# Altium PCB TablePCB2.PcbDoc
Units mm, origin at the board's own origin, x right, y up, seen from the top; angles counter-clockwise.
Board outline 145 x 85.7 mm, 2 copper layers (Top Layer, Bottom Layer); 21 components, 30 nets, 150 pads, 20 vias.
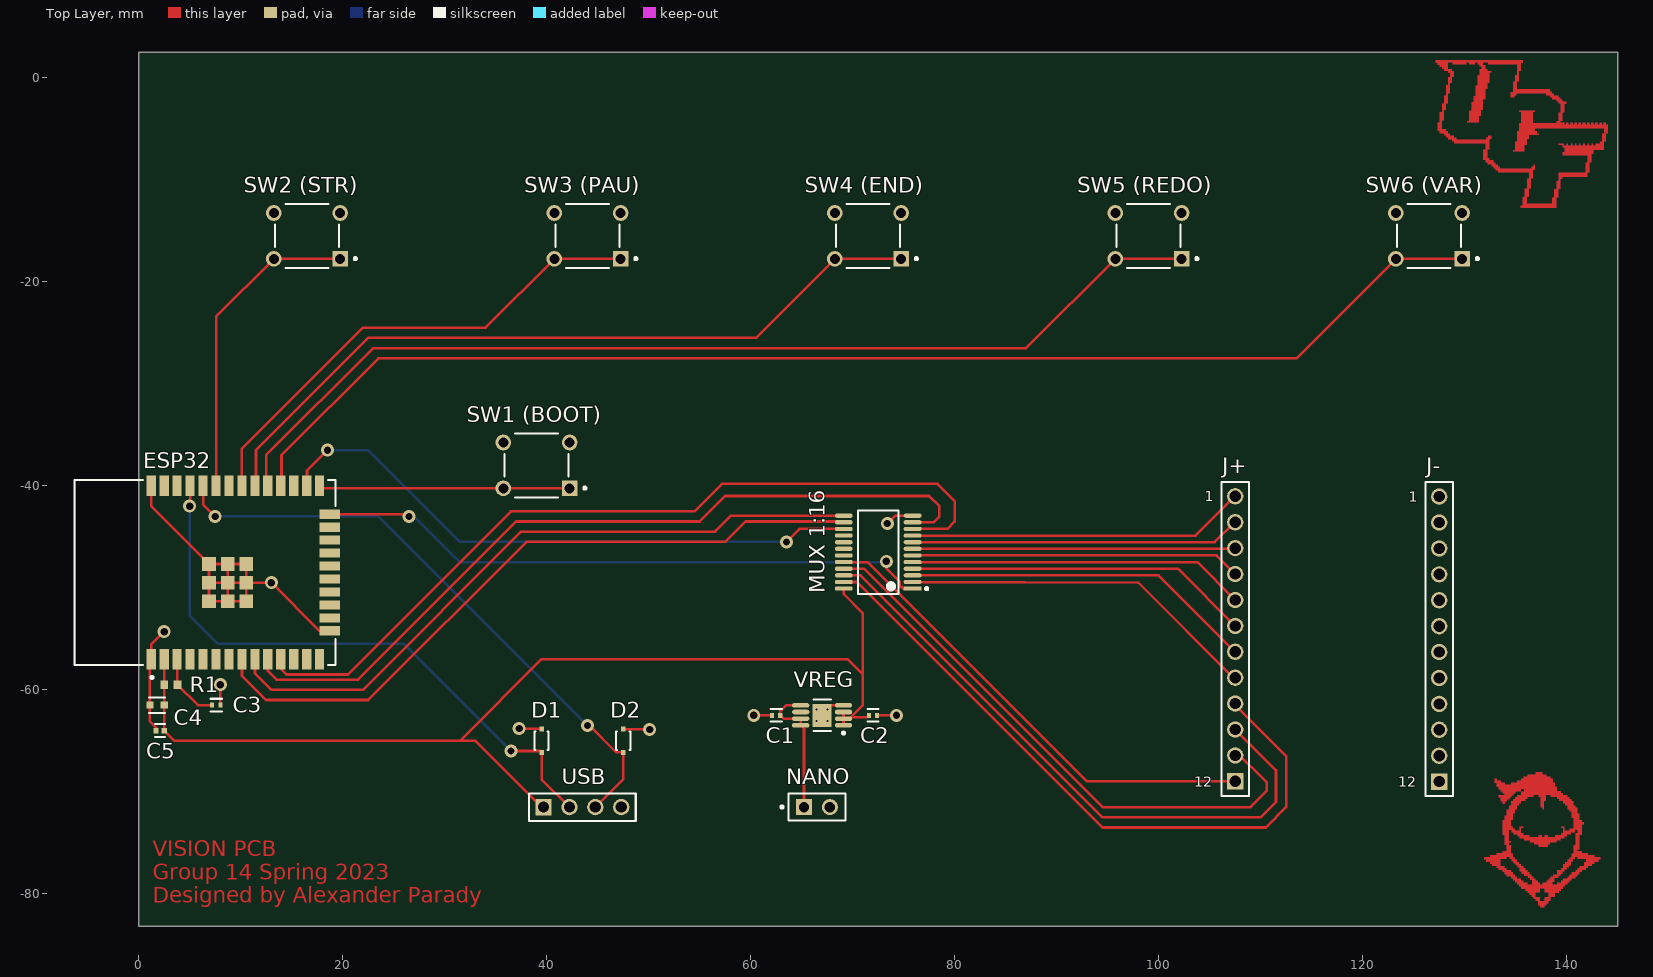
[diagram p0: Top Layer view]
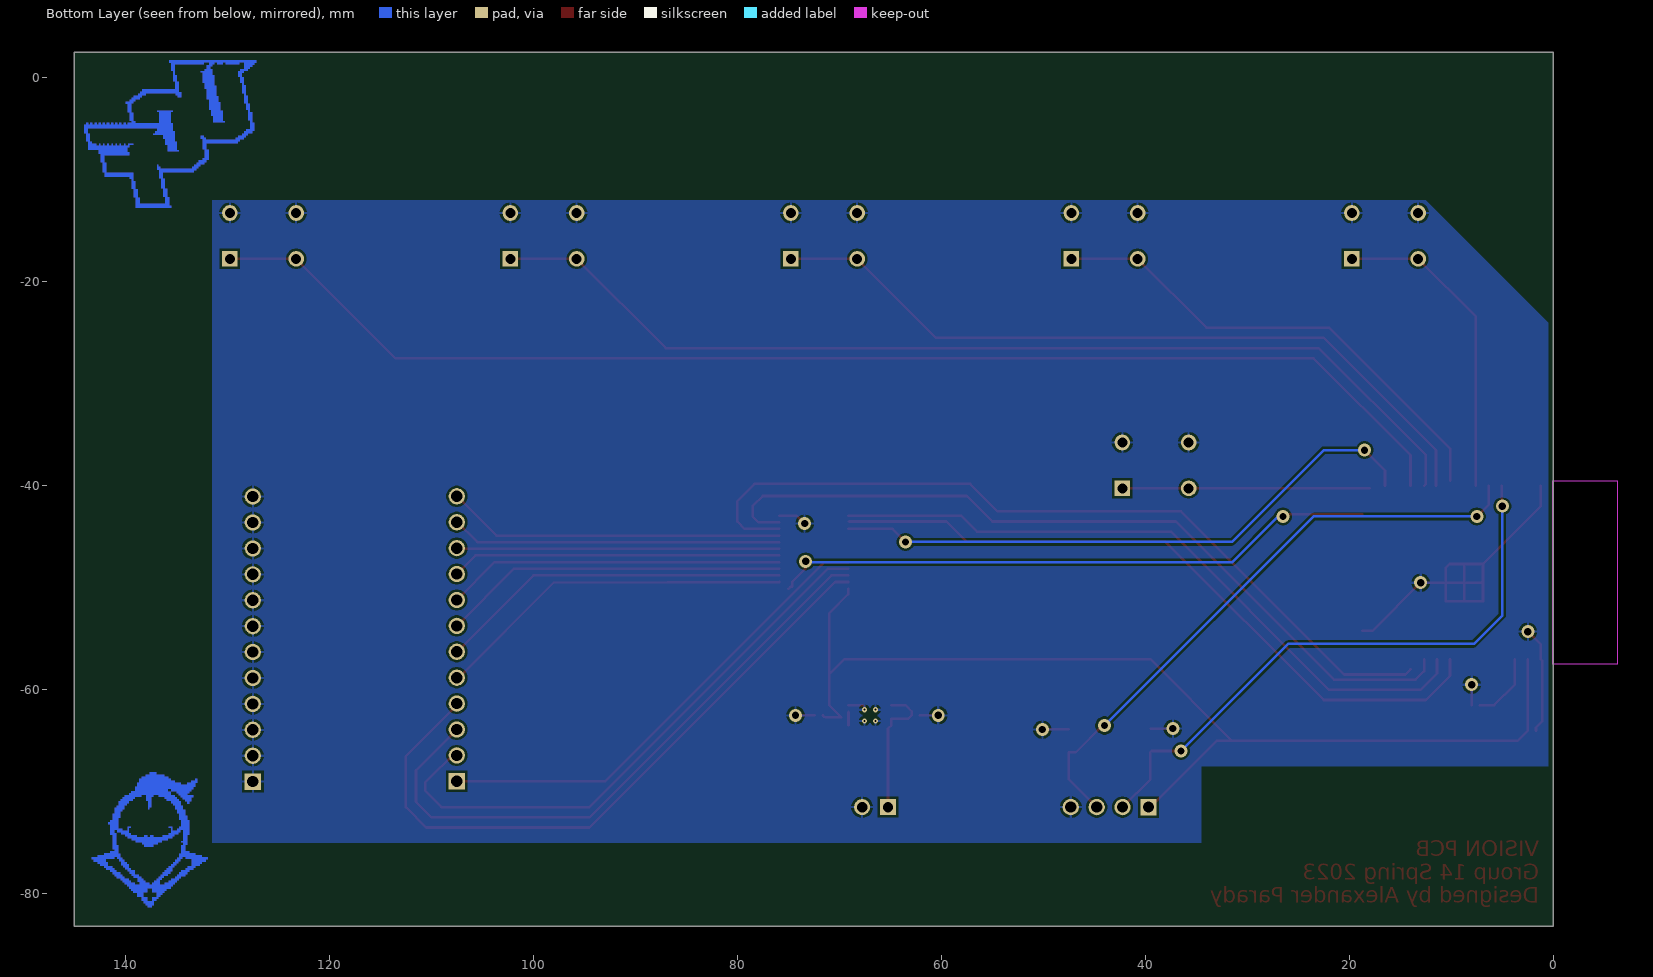
[diagram p1: Bottom Layer view, seen from below]
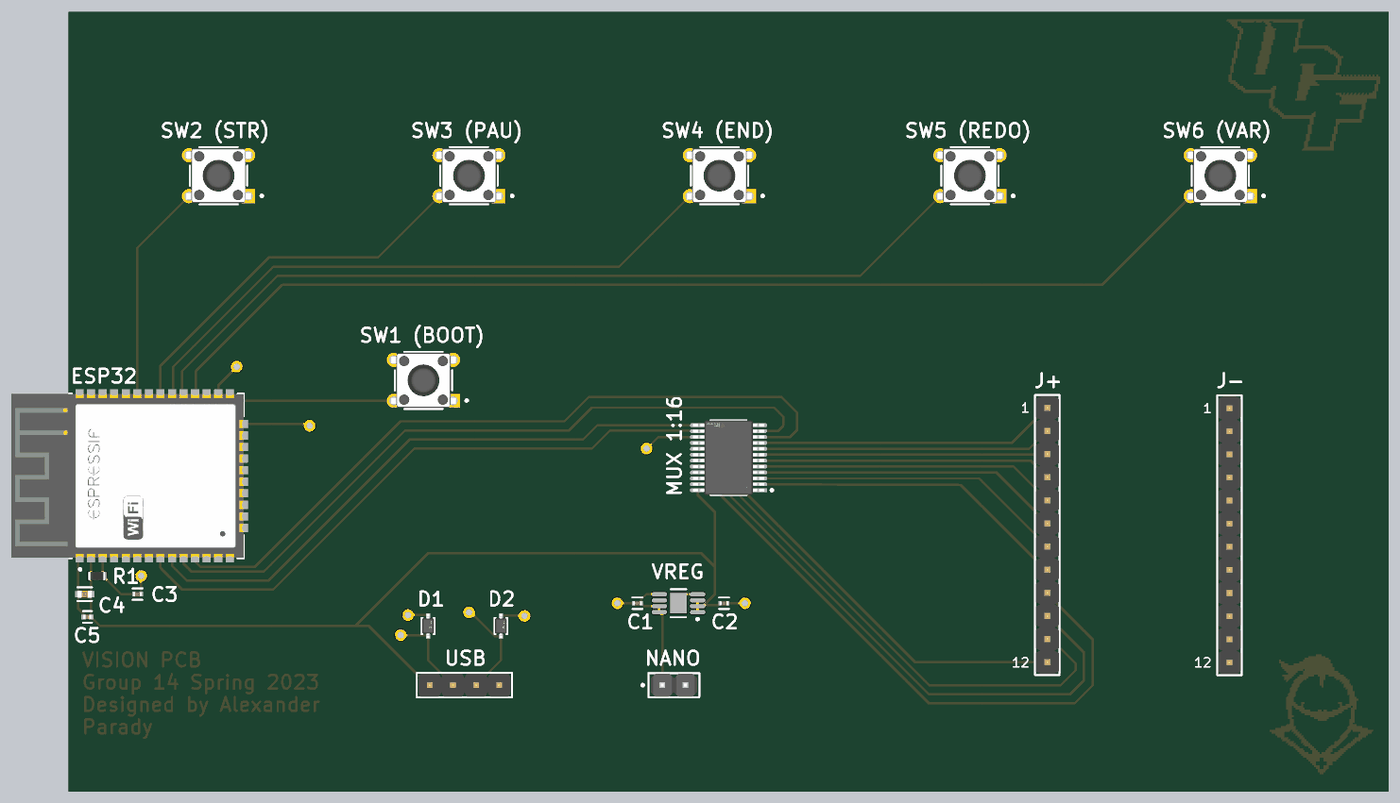
[diagram p2: 3D render of the assembled board from above, using the file's embedded part models]

## Layer stack, top to bottom
Top Solder: solder mask 0.0102, Solder Resist, Dk 3.5
Top Layer: signal copper 0.0356
Dielectric 1: dielectric 0.32, FR-4, Dk 4.8
Bottom Layer: signal copper 0.0356
Bottom Solder: solder mask 0.0102, Solder Resist, Dk 3.5

## Board outline
0,-83.2 145,-83.2 145,2.5 0,2.5

## Design rules (kind name [scope] priority, off if disabled: settings)
Clearance [All] p1: gap=0.2 ignorepadtopadclearanceinfootprint=FALSE except(0: Arc-Hole Track-Hole SMDPad-Hole THPad-Hole Via-Hole Fill-Hole Poly-Hole Region-Hole Text-Hole)
MinimumSolderMaskSliver [All] p1: minsoldermaskwidth=0.22
PolygonConnect [All] p1: connectstyle=Relief reliefconductorwidth=0.254 reliefentries=4 polygonreliefangle="90 Angle" airgapwidth=0.254
RoutingVias [All] p1: holewidth=0.711 width=1.27 viastyle="Through Hole" minholewidth=0.711 minwidth=1.27 maxholewidth=0.711 maxwidth=1.27
SMDNeckDown [All] p1: percent=100.000
SolderMaskExpansion [All] p1: expansion=0.102 istentingtop=FALSE
Width [All] p1: maxlimit=0.254 minlimit=0.254 preferedwidth=0.254
29 further rules are at their usual default settings.

## Components (designator, comment, footprint, x,y, rotation, side; value= is the part's Value field where it differs from the comment)
C1 "1uF" FP-GRM15-0_1-MFG 62.5,-62.5 r180 top
C2 "1uF" FP-GRM15-0_1-MFG 72,-62.5 r0 top
C3 "1uF" FP-GRM15-0_1-MFG 7.6,-61.5 r180 top
C4 "10uF" FP-C1608-080-0_1-MFG 1.8,-61.5 r180 top
C5 "100nF" FP-C0402-BB-MFG 2.1,-64 r0 top value="0.10 μF"
D1 "SP4020-01FTG-C" FP-SP4020-MFG 39.5,-65 r90 top value=2.5pF
D2 "SP4020-01FTG-C" FP-SP4020-MFG 47.5,-65 r90 top value=2.5pF
ESP32 "ESP32-WROOM-32D" FP-ESP32-WROOM-32D-MFG 6.49,-48.5 r90 top
J+ "61301211121" 61301211121 107.5,-55 r90 top
J- "61301211121" 61301211121 127.5,-55.03 r90 top
"MUX 1:16" "CD74HC4067SM96" FP-DB0024A-IPC_C 72.5,-46.5 r180 top
NANO "M20-9990246" FP-M20-9990246-MFG 66.5,-71.5 r0 top
R1 "10k" RESC1609X55X30LL15T15 3.15,-59.5 r180 top
"SW1 (BOOT)" "3-1825910-1" FP-3-1825910-1-MFG 39,-38 r180 top
"SW2 (STR)" "3-1825910-1" FP-3-1825910-1-MFG 16.5,-15.5 r180 top
"SW3 (PAU)" "3-1825910-1" FP-3-1825910-1-MFG 44,-15.5 r180 top
"SW4 (END)" "3-1825910-1" FP-3-1825910-1-MFG 71.5,-15.5 r180 top
"SW5 (REDO)" "3-1825910-1" FP-3-1825910-1-MFG 99,-15.5 r180 top
"SW6 (VAR)" "3-1825910-1" FP-3-1825910-1-MFG 126.5,-15.5 r180 top
USB "61300411121" 61300411121 43.5,-71.5 r0 top
VREG "ADP124ARHZ-3.3-R7" ADI-RH-8-1_N 67,-62.5 r180 top

## Footprints (in the part's own frame and the unit in brackets; to place one, negate y for a bottom-side part, rotate by r counter-clockwise, add the part's x,y. Pads: shape width x height; smd on the part's side, far side on the other; paste and mask are expansions set on the pad)
61300411121 [mm] "Pin Header, pitch 2.54 mm, THT, Vertical, single row, 4p"
  rect 1.6x1.6 hole 1.1: 1(-3.81,0)
  round 1.6 hole 1.1: 2(-1.27,0) 3(1.27,0) 4(3.81,0)
  silkscreen extent -5.23,-1.35 5.23,1.34, body extent -5.08,-1.27 5.08,1.27, height 8.57
61301211121 [mm] "Pin Header, pitch 2.54 mm, THT, Vertical, single row, 12p"
  rect 1.6x1.6 hole 1.1: 1(-13.97,0)
  round 1.6 hole 1.1: 2(-11.43,0) 3(-8.89,0) 4(-6.35,0) 5(-3.81,0) 6(-1.27,0) 7(1.27,0) 8(3.81,0) 9(6.35,0) 10(8.89,0) 11(11.43,0) 12(13.97,0)
  silkscreen extent -15.39,-1.34 15.39,1.35, body extent -15.24,-1.27 15.24,1.27, height 8.57
ADI-RH-8-1_N [mm] "SOP, 8-Leads, Body 3x3mm, Pitch 0.65mm, Thermal Pad 1.73x2.16mm, IPC Medium Density"
  oval 1.7x0.45 smd: 1(-2.1,0.975) 2(-2.1,0.325) 3(-2.1,-0.325) 4(-2.1,-0.975) 5(2.1,-0.975) 6(2.1,-0.325) 7(2.1,0.325) 8(2.1,0.975)
  rect 1.83x2.26 smd: 9(0,0)
  silkscreen extent -2.23,-1.55 0.85,1.87, body extent -1.55,-1.55 1.55,1.55, height 1.1
FP-3-1825910-1-MFG [mm]
  rect 1.54x1.54 hole 0.99 paste-1000 mask+0: 1(-3.25,2.25)
  round 1.54 hole 0.99 paste-1000 mask+0: 2(3.25,2.25) 3(-3.25,-2.25) 4(3.25,-2.25)
  silkscreen extent -4.87,-3.15 3.15,3.15, body extent -4.12,-3.24 4.12,3.24, height 0.25
FP-C0402-BB-MFG [mm]
  rect 0.52x0.52 smd paste+0 mask+0: 1(-0.4,0) 2(0.4,0)
  silkscreen extent -0.5,-0.63 0.5,0.64, body extent -0.8,-0.4 0.8,0.4, height 0.25
FP-C1608-080-0_1-MFG [mm]
  rect 0.7x0.7 smd paste+0 mask+0: 1(-0.7,0) 2(0.7,0)
  silkscreen extent -0.8,-0.75 0.8,0.75, body extent -1.15,-0.55 1.15,0.55, height 0.25
FP-DB0024A-IPC_C [mm]
  rect 1.753x0.415 smd paste+0 mask+0: 1(-3.375,3.575)
  rrect100% 1.753x0.415 smd paste+0 mask+0: 2(-3.375,2.925) 3(-3.375,2.275) 4(-3.375,1.625) 5(-3.375,0.975) 6(-3.375,0.325) 7(-3.375,-0.325) 8(-3.375,-0.975) 9(-3.375,-1.625) 10(-3.375,-2.275) 11(-3.375,-2.925) 12(-3.375,-3.575) 13(3.375,-3.575) 14(3.375,-2.925) 15(3.375,-2.275) 16(3.375,-1.625) 17(3.375,-0.975) 18(3.375,-0.325) 19(3.375,0.325) 20(3.375,0.975) 21(3.375,1.625) 22(3.375,2.275) 23(3.375,2.925) 24(3.375,3.575)
  silkscreen extent -4.88,-4.1 2,4.1, body extent -4.35,-4.2 4.35,4.2, height 0.25
FP-ESP32-WROOM-32D-MFG [mm]
  rect 2x0.9 smd paste+0 mask+0: 1(-8.5,5.26) 2(-8.5,3.99) 3(-8.5,2.72) 4(-8.5,1.45) 5(-8.5,0.18) 6(-8.5,-1.09) 7(-8.5,-2.36) 8(-8.5,-3.63) 9(-8.5,-4.9) 10(-8.5,-6.17) 11(-8.5,-7.44) 12(-8.5,-8.71) 13(-8.5,-9.98) 14(-8.5,-11.25) 25(8.5,-11.25) 26(8.5,-9.98) 27(8.5,-8.71) 28(8.5,-7.44) 29(8.5,-6.17) 30(8.5,-4.9) 31(8.5,-3.63) 32(8.5,-2.36) 33(8.5,-1.09) 34(8.5,0.18) 35(8.5,1.45) 36(8.5,2.72) 37(8.5,3.99) 38(8.5,5.26)
  rect 0.9x2 smd paste+0 mask+0: 15(-5.715,-12.25) 16(-4.445,-12.25) 17(-3.175,-12.25) 18(-1.905,-12.25) 19(-0.635,-12.25) 20(0.635,-12.25) 21(1.905,-12.25) 22(3.175,-12.25) 23(4.445,-12.25) 24(5.715,-12.25)
  rect 1.33x1.33 smd paste+0 mask+0: 39(-2.835,-2.24) 39(-2.835,-0.405) 39(-2.835,-4.075) 39(-1,-0.405) 39(-1,-4.075) 39(-1,-2.24) 39(0.835,-0.405) 39(0.835,-4.075) 39(0.835,-2.24)
  Keep-Out Layer region: -9,6.45 9,6.45 9,12.75 -9,12.75
  Keep-Out Layer region: -9,6.45 9,6.45 9,12.75 -9,12.75
  silkscreen extent -10.4,-12.8 9.05,12.8, body extent -9.6,-13.35 9.6,12.9, height 0.25
FP-GRM15-0_1-MFG [mm]
  rect 0.4x0.5 smd paste+0 mask+0: 1(-0.4,0) 2(0.4,0)
  silkscreen extent -0.55,-0.62 0.55,0.62, body extent -0.7,-0.38 0.7,0.38, height 0.25
FP-M20-9990246-MFG [mm]
  rect 1.57x1.57 hole 1.02 paste-1000 mask+0: 1(-1.27,0)
  round 1.57 hole 1.02 paste-1000 mask+0: 2(1.27,0)
  silkscreen extent -3.55,-1.32 2.79,1.32, body extent -2.89,-1.42 2.89,1.42, height 0.25
FP-SP4020-MFG [mm]
  rect 0.49x0.45 smd paste+0 mask+0: 1(-1.14,0) 2(1.14,0)
  silkscreen extent -0.9,-0.7 0.9,0.7, body extent -1.49,-0.8 1.49,0.8, height 0.25
RESC1609X55X30LL15T15 [mm] "Chip Resistor, 2-Leads, Body 1.75x0.95mm, IPC High Density"
  rect 0.75x0.85 smd: 1(-0.65,0) 2(0.65,0)
  body extent -0.87,-0.48 0.87,0.48, height 0.55

## Part data
C1 C2 C3: library part CMP-2008-04556-2, "CAP CER 1UF 10V X5R 0402", Manufacturer=Murata, Manufacturer Part Number=GRM155R61A105KE15D, Package=GRM15-0.1, Temperature="-55°C to +85°C", Temperature Characteristic=X5R, Temperature Coefficient=15%, Temperature Range High=+85°C, Temperature Range Low=-55°C, Tolerance=10%, Voltage Rating=10V, Automotive=No, Capacitance=1uF, Category=Cap, ComponentLink2Description=Datasheet, ComponentLink2URL=https://search.murata.co.jp/Ceramy/image/img/A01X/G101/ENG/GRM155R61A105KE15-01A.pdf, Device Class L1="Passive Components", Device Class L2=Capacitors, Device Class L3="Ceramic Capacitors", Digikey Description="CAP CER 1UF 10V X5R 0402", Height=0.55mm, Ipc Land Pattern Name=CAPC10050X50, Lead Free=Yes, Material=Ceramic, Mouser Description="0402 1 uF 10 V ±10% Tolerance X5R Surface Mount Multilayer Ceramic Capacitor", Octopart=https://octopart.com/grm155r61a105ke15d-murata-197442, RoHS=TRUE
C4: library part CMP-2000-04979-3, "Multilayer Ceramic Capacitors 10μF ±10% 10V X5R SMD 0603", Case Code (Imperial)=0603, Case Code (Metric)=1608, Dielectric=X5R, Dielectric Material=Ceramic, Max Operating Temperature=85°C, Min Operating Temperature=-55°C, Package Quantity=1, Tolerance=10%, Voltage=10V, Capacitance=10uF, Case/Package=0603, Construction=Flat, Depth=0.8mm, Height=0.8mm, Lead Free="Lead Free", Length=1.6mm, Mount="Surface Mount", Number of Pins=2, Packaging="Tape and Reel", Radiation Hardening=No, REACH SVHC="No SVHC", Resistor Type=Ceramic, RoHS Compliant=Yes, Series=C, Termination=SMD/SMT, Thickness=0.035inch, Voltage Rating=10V, Voltage Rating (DC)=10V, Weight=7.1E-05oz, Width=0.8mm
C5: library part CMP-2008-02046-2, "CAP CER 0.1UF 10V X5R 0402", Capacitance="0.10 μF", Manufacturer=Kemet, Manufacturer Part Number=C0402C104K8PACTU, Package=C0402-BB, Temperature="-55°C to +125°C", Temperature Characteristic=X5R, Temperature Coefficient=15%, Temperature Range High=+125°C, Temperature Range Low=-55°C, Tolerance=0.1, Voltage Rating="10 V", Automotive=No, Category=Cap, ComponentLink2Description=Datasheet, ComponentLink2URL=https://content.kemet.com/datasheets/KEM_C1002_X7R_SMD.pdf, Device Class L1="Passive Components", Device Class L2=Capacitors, Device Class L3="Ceramic Capacitors", Digikey Description="CAP CER 0.1UF 10V X5R 0402", Height=0.55mm, Ipc Land Pattern Name=CAPC10050X50, Lead Free=Yes, Material=Ceramic, Mouser Description="Capacitor 100 nF 10 VDC 0402", Octopart=https://octopart.com/c0402c104k8pactu-kemet-140039, RoHS=TRUE
D1 D2: library part CMP-08607-000034-1, "TVS DIODE 3.3V 21.8V SOD323", Breakdown Voltage=3.5V, Capacitance=2.5pF, Clamping Voltage=21.8V, Manufacturer=Littelfuse, Package=SP4020, Peak Pulse Current=30A, Peak Pulse Power=750W, Reverse Standoff Voltage=3.3V, Temperature="-40°C to +125°C", Temperature Range High=+125°C, Temperature Range Low=-40°C, Automotive=No, Category=Diode, ComponentLink2Description=Datasheet, ComponentLink2URL=https://www.littelfuse.com/~/media/electronics/datasheets/tvs_diode_arrays/littelfuse_tvs_diode_array_sp4020_datasheet.pdf.pdf, Device Class L1="Circuit Protection", Device Class L2="TVS Diodes", Device Class L3=unset, Digikey Description="TVS DIODE 3.3V 21.8V SOD323", Direction=Bidirectional, Height=1mm, Ipc Land Pattern Name=SOD262130X90-2, Lead Free=Yes, Manufacturer Part Number=SP4020-01FTG-C, Mouser Description="SP4020 Series 3.3 V 30 A Bi-Directional SMT TVS Diode - SOD-323", Number Of Channels=1, Octopart=https://octopart.com/sp4020-01ftg-c-littelfuse-30499898, RoHS=TRUE, Standoff Height=0mm
ESP32: library part CMP-194065-000003-1, "WIFI MODULE 32MBITS SPI FLASH", Manufacturer="Espressif Systems", Max Frequency=2484MHz, Max Supply Voltage=3.6V, Min Supply Voltage=3V, Nominal Supply Current=500mA, Temperature="-40°C to +85°C", Temperature Range High=+85°C, Temperature Range Low=-40°C, Automotive=No, Bandwidth=72MHz, Category=UNK, ComponentLink2Description=Datasheet, ComponentLink2URL=https://www.espressif.com/sites/default/files/documentation/esp32-wroom-32d_esp32-wroom-32u_datasheet_en.pdf, Data Rate=150Mbits/s, Device Class L1="Integrated Circuits (ICs)", Device Class L2="RF Semiconductors and Devices", Device Class L3=Transceivers, Digikey Description="WIFI MODULE 32MBITS SPI FLASH", Height=3.2mm, Interface=I2C,SPI,UART,Ethernet,I2S,Other, Lead Free=Yes, Manufacturer Part Number=ESP32-WROOM-32D, Mouser Description="Wi-Fi/BT BLE Module ESP32-D0WD, SPI Flash, UART, P", Number Of Adc Channels=16, Number Of Gpio=32, Octopart=https://octopart.com/esp32-wroom-32d-espressif+systems-91040050, Package=ESP32-WROOM-32D, RoHS=TRUE, Sensitivity=-98dBm
J+ J-: library part CMP-1502-01086-1, "THT Vertical Pin Header WR-PHD, Pitch 2.54 mm, Single Row, 12 pins", Contact Resistance=20mOhm, Manufacturer="Wurth Elektronik", Operating Temperature=-40to105degC, Rated Current=3A, Withstanding Voltage=500VAC, Working Voltage=250VAC, Datasheet URL=https://katalog.we-online.de/em/datasheet/6130xx11121.pdf, Gender=Male, Manufacturer URL=http://www.we-online.de, Mounting Technology=THT, Orientation=Vertical, Package Reference=61301211121, Packaging=Bag, Part Number=61301211121, Pin Number=12, Pitch=2.54mm, Publisher=WurthElektronik, Row Number=Single
"MUX 1:16": library part CMP-04892-000038-1, "IC MUX/DEMUX 1X16 24SSOP", Case/Package=SSOP, High Level Output Current=25mA, Max Operating Temperature=125°C, Max Supply Current=8uA, Max Supply Voltage=6V, Min Operating Temperature=-55°C, Min Supply Voltage=2V, On-State Resistance=160R, Package Quantity=2000, Bandwidth=89MHz, Contact Plating=Gold, Height=1.95mm, Lead Free="Lead Free", Length=8.2mm, Logic Function=Multiplexer, Low Level Output Current=25mA, Max Output Current=25mA, Mount="Surface Mount", Number of Bits=16, Number Of Channels=1, Number of Circuits=16, Number of Inputs=16, Number of Outputs=1, Number of Pins=24, Operating Supply Current=8uA, Packaging="Tape and Reel", Polarity=Non-Inverting, Propagation Delay=75ns, Radiation Hardening=No, REACH SVHC="No SVHC", Series=74HC, Supply Type=Single, Termination=SMD/SMT, Turn-Off Delay Time=290ns, Turn-On Delay Time=300ns, Weight=0.006081oz, Width=5.3mm
NANO: library part CMP-15831-000009-1, "CONN HEADER VERT 2POS 2.54MM", Current Rating=3A, Manufacturer=Harwin, Temperature="-40°C to +105°C", Temperature Range High=+105°C, Temperature Range Low=-40°C, Automotive=No, Category=Conn, ComponentLink2Description=Datasheet, ComponentLink2URL=https://cdn.harwin.com/pdfs/M20-999.pdf, Conn Gender=Male, Conn Orientation=Vertical, Contact Material=Tin,Nickel, Device Class L1=Connectors, Device Class L2="Headers and Wire Housings", Device Class L3=unset, Digikey Description="CONN HEADER VERT 2POS 2.54MM", Height=8.99mm, Lead Free=Yes, Manufacturer Part Number=M20-9990246, Mouser Description="2.54mm (0.1\") Pitch SIL Vertical PC Tail Pin Header, 6.1mm mating pin height, tin, 2 contacts", Number Of Contacts=2, Number Of Rows=1, Octopart=https://octopart.com/m20-9990246-harwin-2590635, Package=M20-9990246, Pitch=2.54mm, RoHS=TRUE
R1: library part CMP-1012-00623-3, "Chip Resistor, 10 KOhm, +/- 1%, 0.1 W, -55 to 155 degC, 0603 (1608 Metric), RoHS, Tape and Reel", Case Code (Imperial)=0603, Case Code (Metric)=1608, Manufacturer=Panasonic, Max Operating Temperature=155degC, Max Power Dissipation=100mW, Min Operating Temperature=-55degC, Package Description="2-Pin Surface Mount Device, Body 1.6 x 0.85 mm", Package Quantity=1, Package Reference=603, Resistance=10KOhm, Temperature Coefficient=100ppm\/degreesC, Tolerance=1%, Voltage Rating=75V, Case\/Package=0603, Composition=ThickFilm, Contact Plating=Tin, Datasheet URL=https://industrial.panasonic.com/cdbs/www-data/pdf/RDA0000/AOA0000C304.pdf, Datasheet Version=02/2017, Depth=0.8mm, Height=0.45mm, Lead Free=LeadFree, Length=1.6mm, Manufacturer URL=http://www.panasonic.com/, Military Standard=Not, Mount=SurfaceMount, Mounting Technology=SurfaceMount, Number of Pins=2, Number of Terminations=2, Packaging=TapeandReel, Power Rating=100mW, Radiation Hardening=No, REACH SVHC=NoSVHC, RoHSCompliant=true, Termination=SMD/SMT, Voltage Rating (DC)=75V, Width=0.031inch
"SW1 (BOOT)" "SW2 (STR)" "SW3 (PAU)" "SW4 (END)" "SW5 (REDO)" "SW6 (VAR)": library part CMP-03407-000001-1, "SWITCH TACTILE SPST-NO 0.05A 24V", Contact Current Rating=50mA, Contact Resistance=100mΩ, Manufacturer="TE Connectivity", Operating Force=160gf, Package=0, Temperature="-35°C to +85°C", Temperature Range High=+85°C, Temperature Range Low=-35°C, Automotive=No, Category=Switch, ComponentLink2Description=Datasheet, ComponentLink2URL=https://www.te.com/commerce/DocumentDelivery/DDEController?Action=srchrtrv&DocNm=1825910&DocType=Customer+Drawing&DocLang=English, Device Class L1=Electromechanical, Device Class L2=Switches, Device Class L3="Tactile Switches", Digikey Description="SWITCH TACTILE SPST-NO 0.05A 24V", Electromechanical Life=100000Cycles, Height=17.3mm, Lead Free=Yes, Manufacturer Part Number=3-1825910-1, Mount="Through Hole", Octopart=https://octopart.com/3-1825910-1-te+connectivity-46506874, RoHS=TRUE, Throw Configuration=SPST-NO
USB: library part CMP-1502-01064-1, "THT Vertical Pin Header WR-PHD, Pitch 2.54 mm, Single Row, 4 pins", Contact Resistance=20mOhm, Manufacturer="Wurth Elektronik", Operating Temperature=-40to105degC, Rated Current=3A, Withstanding Voltage=500VAC, Working Voltage=250VAC, Datasheet URL=https://katalog.we-online.de/em/datasheet/6130xx11121.pdf, Gender=Male, Manufacturer URL=http://www.we-online.de, Mounting Technology=THT, Orientation=Vertical, Package Reference=61300411121, Packaging=Bag, Part Number=61300411121, Pin Number=4, Pitch=2.54mm, Publisher=WurthElektronik, Row Number=Single
VREG: library part CMP-0786-00223-1, "500 mA, Low Quiescent Current, CMOS Linear Regulator, 2.3 to 5.5 V Vin, 3.3 V Vout, Industrial, 8-pin SOP (RH-8-1), Reel", Manufacturer="Analog Devices", Preset Vout Values (V)=3.3, Supply Current IGND @ Small Load=45uA, Code_JEDEC=MO-187-AA-T, ComponentLink1Description="Manufacturer URL", ComponentLink1URL=http://www.analog.com/en/index.html, ComponentLink2Description=Datasheet, ComponentLink2URL=http://www.analog.com/static/imported-files/data_sheets/ADP124_125.pdf, ComponentLink3Description="Package Specification", ComponentLink3URL=http://www.analog.com/static/imported-files/packages/PKG_PDF/MSOP_ED(RH)/RH_8_1.pdf, ComponentLink4Description="URL Link1", ComponentLink4URL="Product URL:http://www.analog.com/en/ADP124/productSearch.html", DatasheetVersion="Rev. C", Iout max=500mA, Mounting Technology="Surface Mount", PackageDescription="8-Pin Mini Small Outline Package, Body 3 x 3 mm, Pitch 0.65 mm", PackageReference=RH-8-1, PackageVersion="071008-A, 08/2008", Packing=Reel, PartNumber=ADP124ARHZ-3.3-R7, Vin (max) (V)=5.5, Vin (min) (V)=2.3

## Via types
v1: diameter 1.27, hole 0.711, Top Layer to Bottom Layer, 16 vias
v2: diameter 0.5, hole 0.2, Top Layer to Bottom Layer, 4 vias

## Nets (pads, with @x,y where several pads share a name; then routed paths per layer and width w, separated by ;. In a path a pad name is that pad's centre, name@x,y a point inside that pad or via, vN(x,y) a via of type N, cw(c..) or ccw(c..) an arc to the next point about the centre after c; other vN are vias at no path point)
3.3V: "MUX 1:16.24" C2.1 C4.1 C5.2 ESP32.2 R1.2 USB.1 VREG.1 VREG.2 VREG.3 | length 107.7
  Top Layer w0.254: ESP32.2 R1.2 C4.1 C5.2 3.5,-65 31.5,-65 ; USB.1@39.5,-71.5 33,-65 31.5,-65 ; VREG.1 VREG.2 VREG.3 ; 69.125,-50.075 69.125,-50.625 71,-52.5 71,-58.5 ; C2.1 71.6,-62.55 71.527,-62.623 71.455,-62.623 71.378,-62.7 69.8,-62.7 71,-61.5 71,-58.5 ; 31.5,-65 39.5,-57 69.5,-57 71,-58.5
5V: C1.1 NANO.1 VREG.5 VREG.7 VREG.8 | length 14.2
  Top Layer w0.254: VREG.5 63.475,-61.525 62.9,-62.1 C1.1 63.225,-62.825 64.89,-62.825 VREG.8 65.23,-63.805 NANO.1 65.146,-70.842 NANO.1@65.146,-70.84
BOOT: "SW1 (BOOT).1" "SW1 (BOOT).2" ESP32.25 | length 24.3
  Top Layer w0.254: ESP32.25@18,-40.25 35.75,-40.25 42.25,-40.25
END: "SW4 (END).1" "SW4 (END).2" ESP32.30 | length 74.5
  Top Layer w0.254: ESP32.30@11.5,-40 11.5,-36.5 22.5,-25.5 60.5,-25.5 68.25,-17.75 74.75,-17.75
GND: "MUX 1:16.12" "SW1 (BOOT).3" "SW1 (BOOT).4" "SW2 (STR).3" "SW2 (STR).4" "SW3 (PAU).3" "SW3 (PAU).4" "SW4 (END).3" "SW4 (END).4" "SW5 (REDO).3" "SW5 (REDO).4" "SW6 (VAR).3" "SW6 (VAR).4" C1.2 C2.2 C3.1 C4.2 C5.1 D1.2 D2.2 ESP32.1 ESP32.15 ESP32.38 ESP32.39 J-.1 J-.2 J-.3 J-.4 J-.5 J-.6 J-.7 J-.8 J-.9 J-.10 J-.11 J-.12 NANO.2 USB.4 VREG.4 VREG.9 | length 67.5
  Top Layer w0.254: ESP32.1@1.1,-57.13 C4.2 1.1,-63.1 1.7,-63.7 C5.1 ; ESP32.1 1.23,-55.57 v1(2.5,-54.3) ; ESP32.38 1.23,-42 ESP32.39@6.895,-47.665 ; ESP32.39@7,-49.395 ESP32.39@6.895,-49.5 ; C3.1 v1(8,-59.5) ; ESP32.39@8.73,-51.335 ESP32.39@8.73,-49.5 ; ESP32.39@8.73,-47.665 ESP32.39@8.73,-49.5 ; ESP32.15 17.715,-54.215 v1(13,-49.5) 10.565,-49.5 ESP32.39@8.73,-49.5 ; v1(37.3,-63.8) D1.2@39.44,-63.8 ; D2.2 v1@50.06,-63.86 ; v1(60.3,-62.5) C1.2 ; v2(67.55,-61.95) 67.55,-61.65 67.675,-61.525 VREG.4 ; C2.2 v1(74.3,-62.5) ; v1(73.4,-43.7) 74.175,-42.925 75.875,-42.925 ; ESP32.39@6.895,-49.5 ESP32.39@6.895,-47.665 ; ESP32.39@6.895,-49.5 ESP32.39@8.73,-49.5 ; ESP32.39@6.895,-49.5 6.895,-51.335 10.565,-51.335 10.565,-48.065 10.165,-47.665 ESP32.39@6.895,-47.665
  other v1: 50.1,-63.9
  other v2: 66.45,-63.05 67.55,-63.05 66.45,-61.95
MXEN: "MUX 1:16.15" ESP32.26 | length 59.2
  Top Layer w0.254: ESP32.26@16.5,-40 16.5,-38.5 v1(18.5,-36.5) ; v1(63.5,-45.5) 64.775,-44.225 69.125,-44.225
  Bottom Layer w0.254: v1(18.5,-36.5) 22.5,-36.5 31.5,-45.5 v1(63.5,-45.5)
NetC3_2: C3.2 ESP32.3 R1.1 | length 6.7
  Top Layer w0.254: ESP32.3 3.77,-59.47 5.8,-61.5 C3.2
PAU: "SW3 (PAU).1" "SW3 (PAU).2" ESP32.31 | length 48
  Top Layer w0.254: ESP32.31@10.1,-39.5 10.1,-36.4 22,-24.5 34,-24.5 40.75,-17.75 47.25,-17.75
REDO: "SW5 (REDO).1" "SW5 (REDO).2" ESP32.29 | length 100.8
  Top Layer w0.254: ESP32.29 12.5,-39.84 12.5,-37 23,-26.5 87,-26.5 95.75,-17.75 102.25,-17.75
RX: D2.1 ESP32.34 USB.3 | length 59.4
  Top Layer w0.254: ESP32.34 6.31,-41.81 v1(7.5,-43) ; v1@44.18,-63.5 46.82,-66.14 D2.1 47.5,-68.77 USB.3
  Bottom Layer w0.254: v1(7.5,-43) 23.5,-43 v1(44,-63.5)
S0: "MUX 1:16.10" ESP32.11 | length 81.1
  Top Layer w0.254: ESP32.11@14,-58 14.5,-58.5 20.5,-58.5 36.5,-42.5 54.5,-42.5 57.184,-39.816 78.316,-39.816 80,-41.5 80,-43.5 79.275,-44.225 75.875,-44.225
S1: "MUX 1:16.11" ESP32.10 | length 79.1
  Top Layer w0.254: ESP32.10@12.67,-57 12.67,-58.17 13.5,-59 21.5,-59 37,-43.5 55,-43.5 57.5,-41 77.5,-41 78.5,-42 78.5,-43 77.925,-43.575 75.875,-43.575
S2: "MUX 1:16.14" ESP32.8 | length 68.8
  Top Layer w0.254: ESP32.8@10.13,-57 10.13,-58.63 12.5,-61 22.5,-61 38,-45.5 57.5,-45.5 59.5,-43.5 69.05,-43.5
S3: "MUX 1:16.13" ESP32.9 | length 66.9
  Top Layer w0.254: ESP32.9@11.4,-57 11.4,-58.4 13,-60 22,-60 37.5,-44.5 56.5,-44.5 58.075,-42.925 69.125,-42.925
SIG: "MUX 1:16.1" ESP32.24 | length 59.7
  Top Layer w0.254: ESP32.24 v1@26.285,-42.785 ; v1(73.3,-47.4) 73.3,-48.1 74.6,-49.4 74.6,-49.9 74.8,-49.9 75,-50.1
  Bottom Layer w0.254: v1(26.5,-43) 27,-43 31.5,-47.5 v1@73.3,-47.5
SP0: "MUX 1:16.9" J+.12 | length 33.2
  Top Layer w0.254: 75.875,-44.875 103.625,-44.875 J+.12@107.485,-41.015
SP1: "MUX 1:16.8" J+.11 | length 32.4
  Top Layer w0.254: 75.875,-45.525 105.475,-45.525 J+.11@107.465,-43.535
SP2: "MUX 1:16.7" J+.10 | length 31.6
  Top Layer w0.254: 75.875,-46.175 J+.10@107.5,-46.175
SP3: "MUX 1:16.6" J+.9 | length 32.4
  Top Layer w0.254: 75.875,-46.825 105.675,-46.825 J+.9
SP4: "MUX 1:16.5" J+.8 | length 33.2
  Top Layer w0.254: 75.875,-47.475 103.785,-47.475 J+.8
SP5: "MUX 1:16.4" J+.7 | length 33.9
  Top Layer w0.254: 75.875,-48.125 101.895,-48.125 J+.7
SP6: "MUX 1:16.3" J+.6 | length 34.7
  Top Layer w0.254: 75.875,-48.775 100.005,-48.775 J+.6
SP7: "MUX 1:16.2" J+.5 | length 35.3
  Top Layer w0.254: 75.875,-49.425 98,-49.502 J+.5@107.308,-58.81
SP8: "MUX 1:16.23" J+.4 | length 66.2
  Top Layer w0.254: 69.125,-49.425 70.425,-49.425 94.5,-73.5 110.5,-73.5 112.5,-71.5 112.5,-66.5 J+.4@107.5,-61.5
SP9: "MUX 1:16.22" J+.3 | length 61.6
  Top Layer w0.254: 69.125,-48.775 70.775,-48.775 94.5,-72.5 110,-72.5 111.5,-71 111.5,-67.89 J+.3
SP10: "MUX 1:16.21" J+.2 | length 57
  Top Layer w0.254: 69.125,-48.125 71.125,-48.125 94.5,-71.5 109,-71.5 110.607,-69.893 110.607,-69.107 J+.2@107.5,-66
SP11: "MUX 1:16.20" J+.1 | length 47.2
  Top Layer w0.254: 69.125,-47.475 71.475,-47.475 92.97,-68.97 ; 93.03,-68.97 J+.1
STR: "SW2 (STR).1" "SW2 (STR).2" ESP32.33 | length 31.1
  Top Layer w0.254: ESP32.33@7.59,-40 7.59,-23.41 13.25,-17.75 19.75,-17.75
TX: D1.1 ESP32.35 USB.2 | length 59
  Top Layer w0.254: v1@5.04,-41.96 ESP32.35 ; v1(36.5,-66) D1.1@39.36,-66 ; D1.1 39.5,-68.77 USB.2
  Bottom Layer w0.254: v1(5,-42) 5,-52.701 7.799,-55.5 26,-55.5 v1(36.5,-66)
VAR: "SW6 (VAR).1" "SW6 (VAR).2" ESP32.28 | length 126.7
  Top Layer w0.254: ESP32.28@14,-40 14,-37 23.5,-27.5 113.5,-27.5 123.25,-17.75 129.75,-17.75
pads on no net: "MUX 1:16.16" "MUX 1:16.17" "MUX 1:16.18" "MUX 1:16.19" ESP32.4 ESP32.5 ESP32.6 ESP32.7 ESP32.12 ESP32.13 ESP32.14 ESP32.16 ESP32.17 ESP32.18 ESP32.19 ESP32.20 ESP32.21 ESP32.22 ESP32.23 ESP32.27 ESP32.32 ESP32.36 ESP32.37 VREG.6

## Polygon pours and split planes (outlines as drawn)
GND on Bottom Layer "GND_L02_P000" (solid, pour order 0): 34.5,-75 34.5,-67.5 0.5,-67.5 0.5,-24 12.5,-12 131.5,-12 131.5,-75

## Other copper
Top Layer:
  text "VISION PCB / Group 14 Spring 2023 / Designed by Alexander Parady" at 1.4,-80.9 h1.52
Multi-Layer:
  region: 241 vertices and 1 holes, not listed, extent 127.172,-12.725 144.038,1.702
  region: 255 vertices and 7 holes, not listed, extent 131.91,-81.309 143.29,-68.101

## Text inside footprints (layer, text, board x,y; h text height)
J+: Top Overlay "12" at 103.5,-69.5 h1.02; Top Overlay "1" at 104.5,-41.5 h1.02
J-: Top Overlay "12" at 123.5,-69.5 h1.02; Top Overlay "1" at 124.5,-41.56 h1.02